# Altium PCB Panel_Battery_Charger.PcbDoc
Units mm, origin at the board's own origin, x right, y up, seen from the top; angles counter-clockwise.
Board outline 122.68 x 117.35 mm, 6 copper layers (L1S-TOP, L2PWR-VSS, L3S, L4S, L5PWR-VSS, L6S-BOT), stack 1.567 mm thick; 6 components, 0 nets, 9 pads, 0 vias.
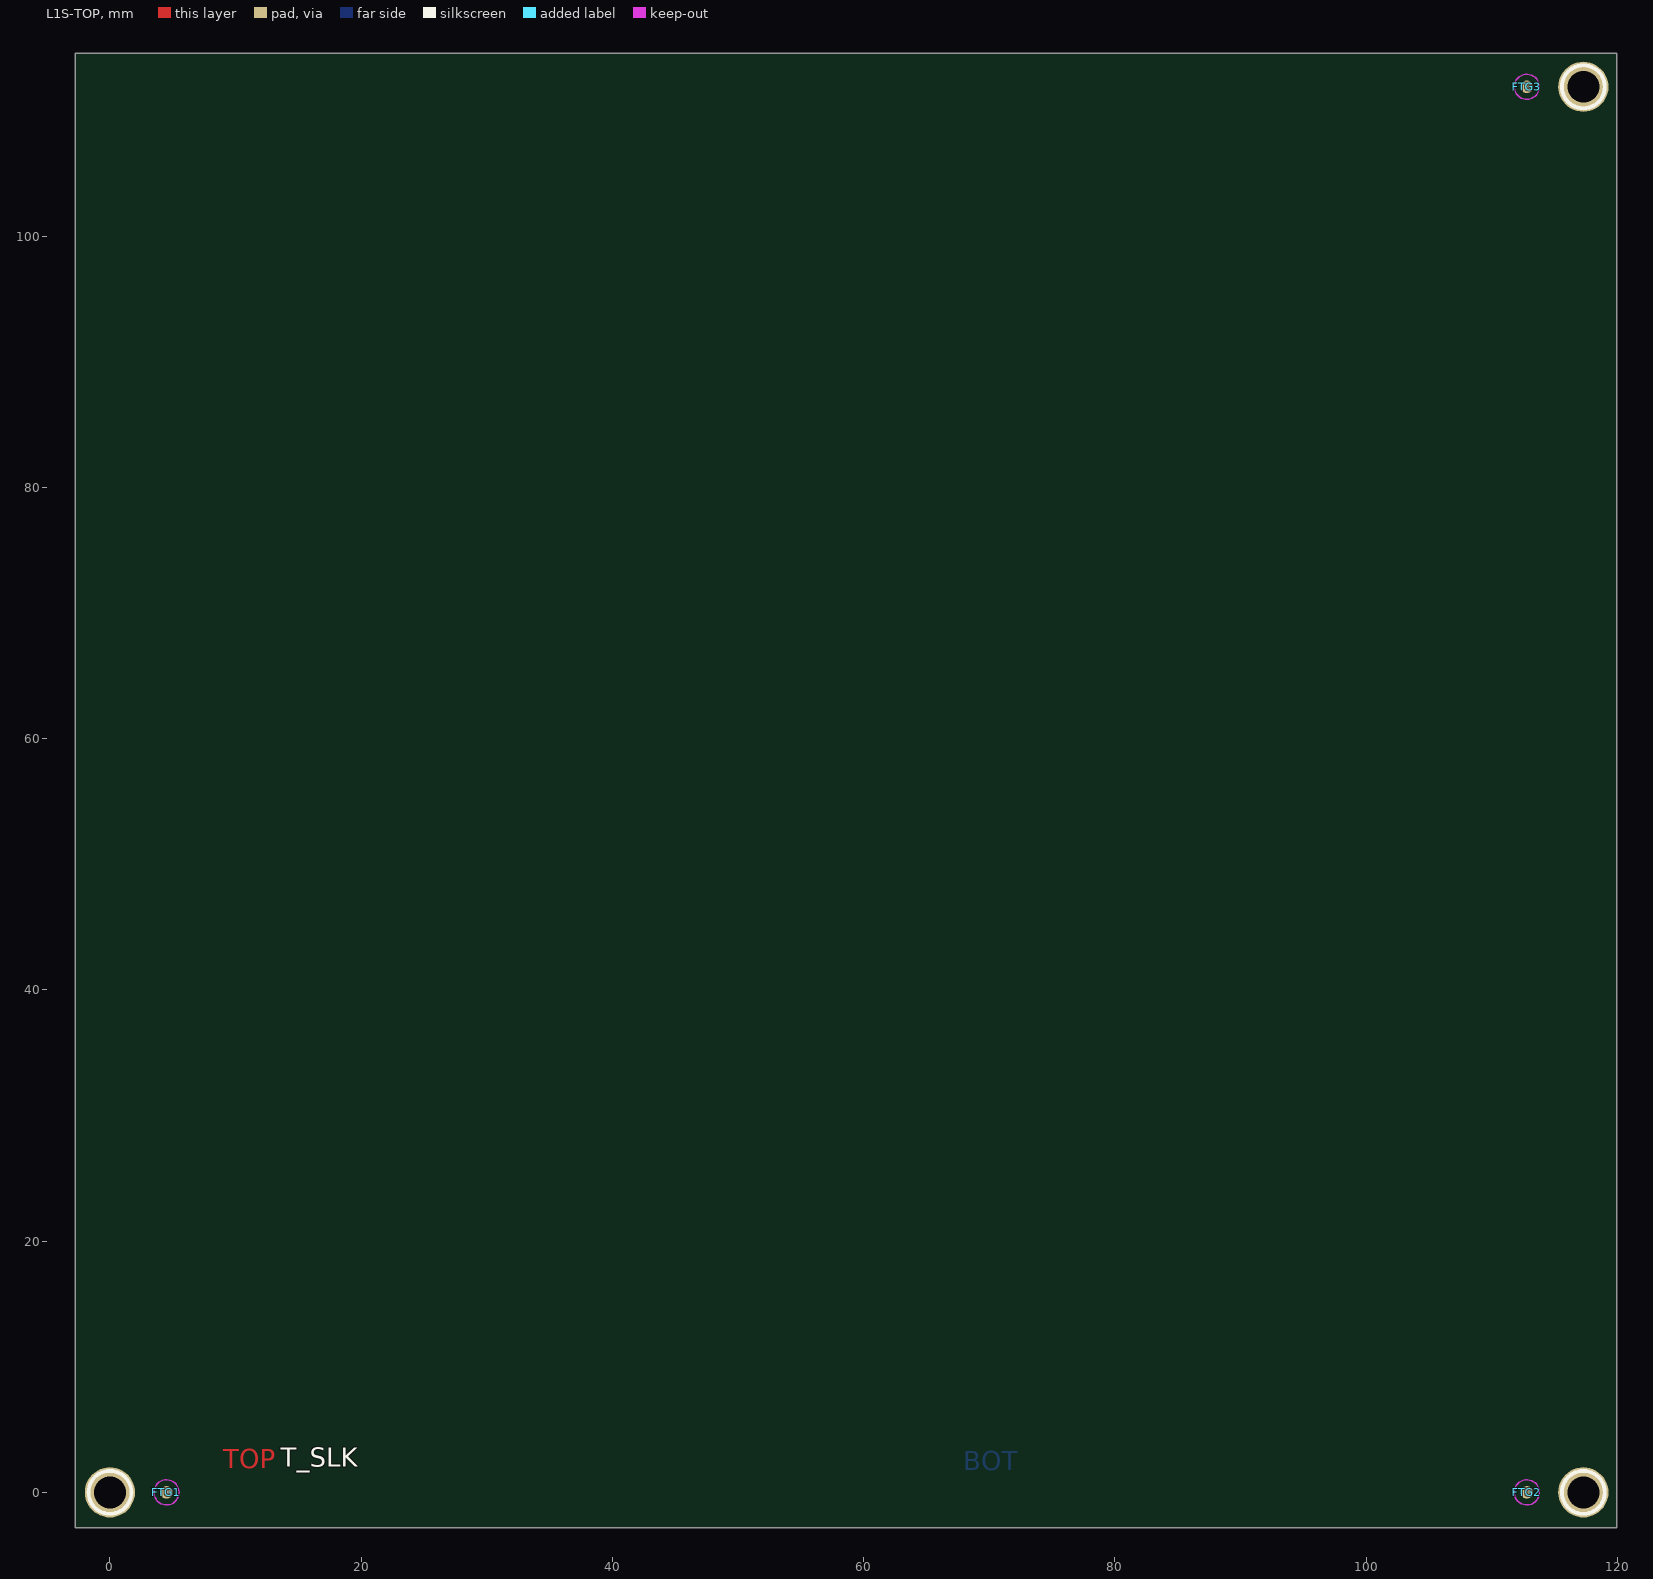
[diagram p0: L1S-TOP view]
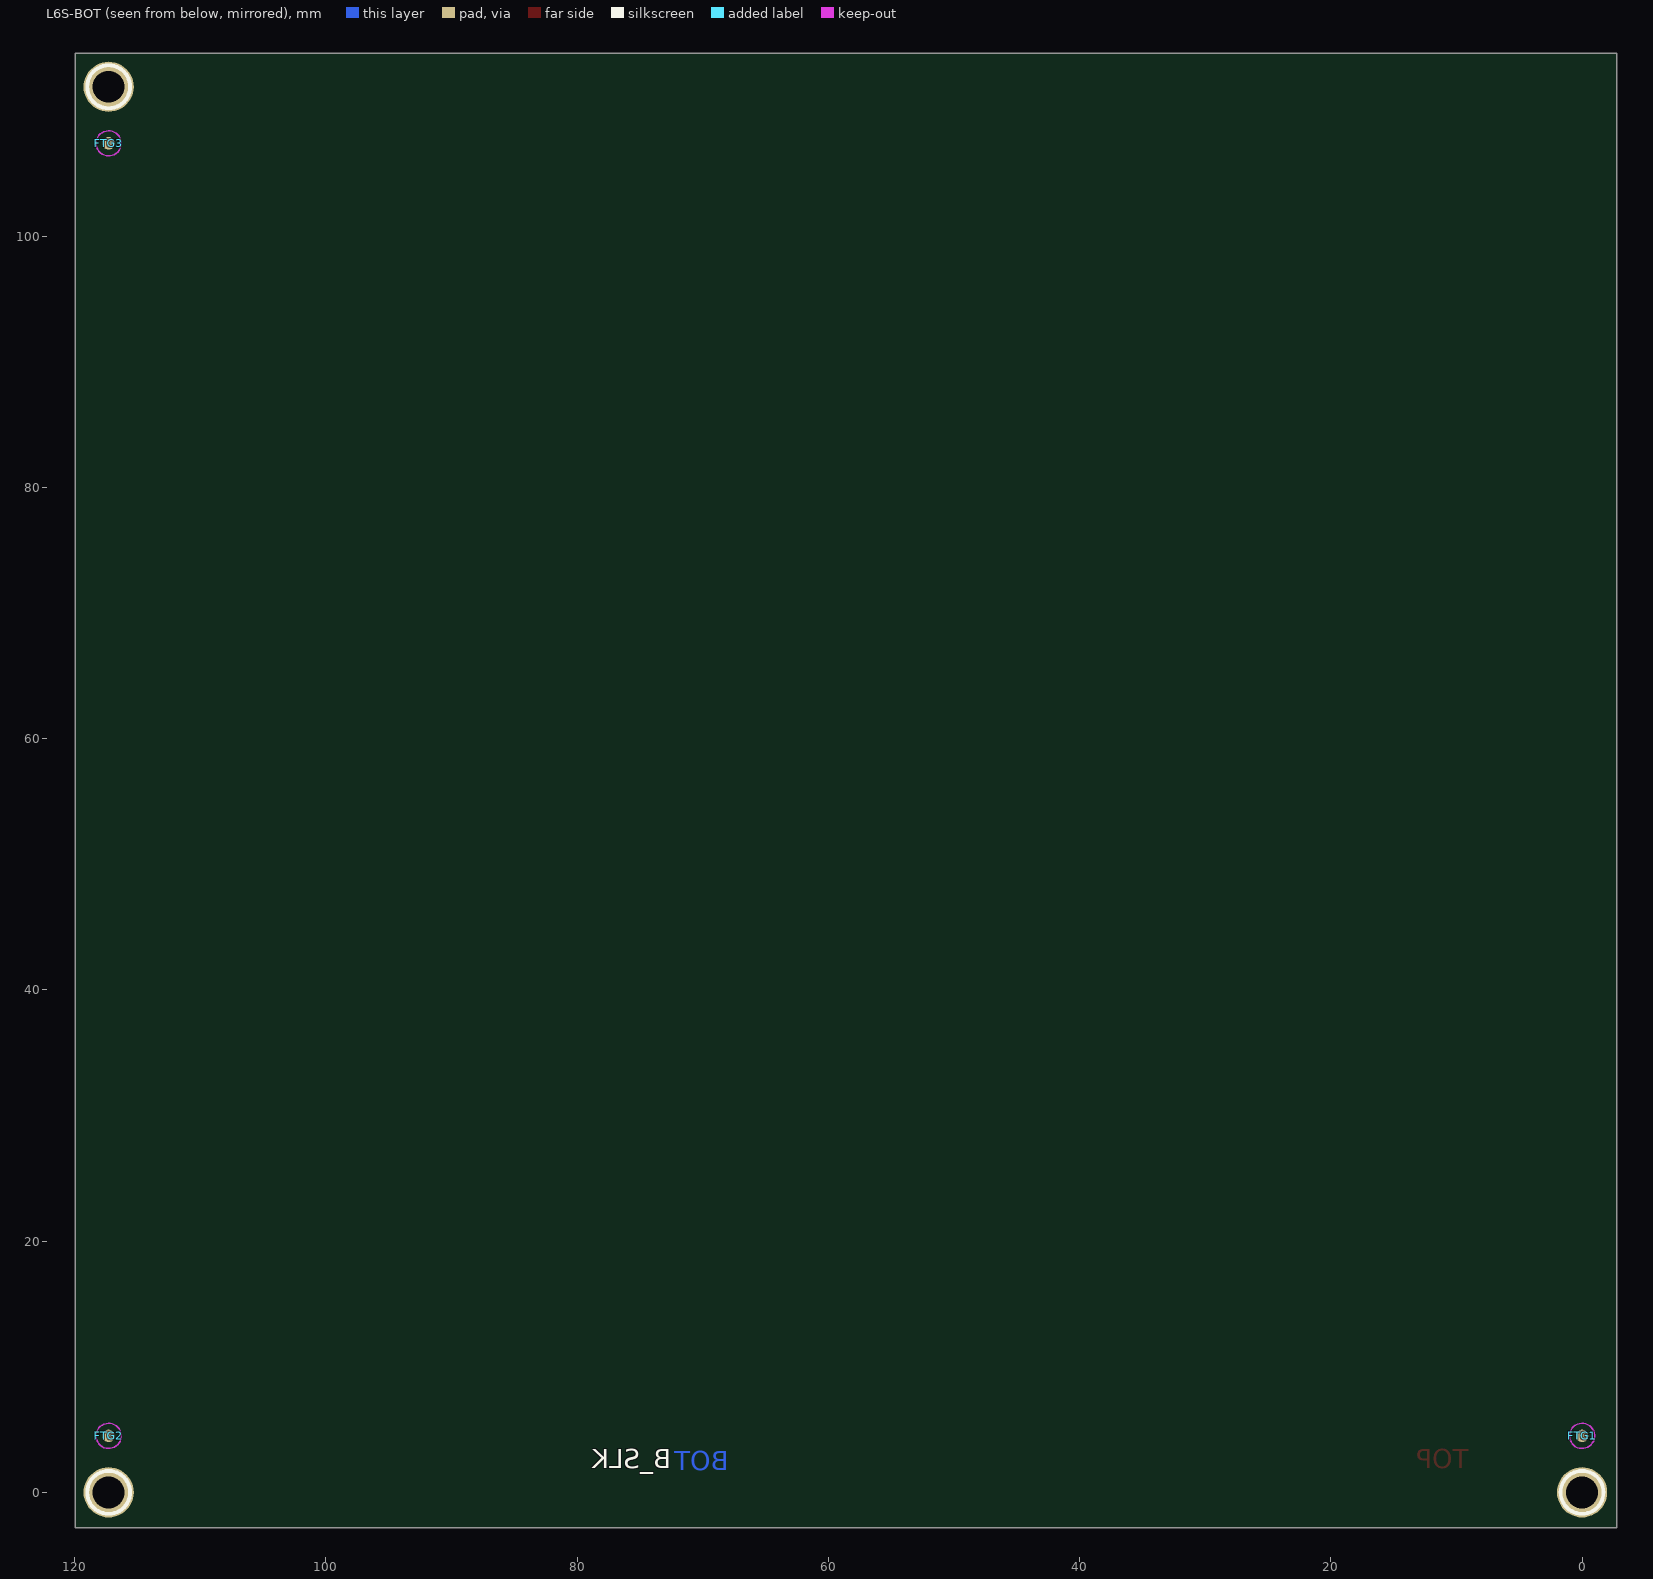
[diagram p1: L6S-BOT view, seen from below]

## Layer stack, top to bottom
Top Solder: solder mask 0.017, Solder Resist, Dk 4
L1S-TOP: signal copper 0.035
PP-1080*1: prepreg 0.078, FR-4, Dk 3.9
L2PWR-VSS: signal copper 0.015
PP-1080*2-1: prepreg 0.156, FR-4, Dk 3.9
L3S: signal copper 0.017
Core_1: core 0.965, FR-4, Dk 4.6
L4S: signal copper 0.017
PP-1080*2-2: prepreg 0.156, FR-4, Dk 3.9
L5PWR-VSS: signal copper 0.015
Dielectric 5: prepreg 0.078, FR-4, Dk 3.9
L6S-BOT: signal copper 0.035
Bottom Solder: solder mask 0.017, Solder Resist, Dk 4

## Board outline
-2.742,-2.797 -2.742,114.551 119.94,114.551 119.94,-2.797

## Design rules (kind name [scope] priority, off if disabled: settings)
Clearance [All] p1: gap=0.254 ignorepadtopadclearanceinfootprint=FALSE except(0: Arc-Hole Track-Hole SMDPad-Hole THPad-Hole Via-Hole Fill-Hole Poly-Hole Region-Hole Text-Hole)
PolygonConnect [All] p1: connectstyle=Relief reliefconductorwidth=0.254 reliefentries=4 polygonreliefangle="90 Angle" airgapwidth=0.254
RoutingVias [All] p1: holewidth=0.711 width=1.27 viastyle="Through Hole" minholewidth=0.711 minwidth=1.27 maxholewidth=0.711 maxwidth=1.27
SolderMaskExpansion [All] p1: expansion=0.102
Width [All] p1: maxlimit=0.254 minlimit=0.254 preferedwidth=0.254
30 further rules are at their usual default settings.

## Components (designator, comment, footprint, x,y, rotation, side; value= is the part's Value field where it differs from the comment)
FTG1 "Use only in PCB" Fiducial_Bottom_C100_200#1 0,4.5 r90 top (schematic designator FTG4)
FTG1 "Use only in PCB" FIDUCIAL_TOP_C100-200#1 4.5,0 r0 top
FTG2 "Use only in PCB" Fiducial_Bottom_C100_200#2 117.3,4.5 r90 top (schematic designator FTG4)
FTG2 "Use only in PCB" FIDUCIAL_TOP_C100-200#2 112.8,0 r0 top (schematic designator FTG1)
FTG3 "Use only in PCB" Fiducial_Bottom_C100_200#3 117.3,107.4 r90 top (schematic designator FTG4)
FTG3 "Use only in PCB" FIDUCIAL_TOP_C100-200#3 112.8,111.9 r0 top (schematic designator FTG1)

## Footprints (in the part's own frame and the unit in brackets; to place one, negate y for a bottom-side part, rotate by r counter-clockwise, add the part's x,y. Pads: shape width x height; smd on the part's side, far side on the other; paste and mask are expansions set on the pad)
Fiducial_Bottom_C100_200#1 [mm]
  round 1 smd far side paste-0.51 mask+0.5: FTG1(0,0)
  L6S-BOT keep-out circle w0.1: c0,0 r1
Fiducial_Bottom_C100_200#2 [mm]
  round 1 smd far side paste-0.51 mask+0.5: FTG2(0,0)
  L6S-BOT keep-out circle w0.1: c0,0 r1
Fiducial_Bottom_C100_200#3 [mm]
  round 1 smd far side paste-0.51 mask+0.5: FTG3(0,0)
  L6S-BOT keep-out circle w0.1: c0,0 r1
FIDUCIAL_TOP_C100-200#1 [mm] "Round Fiducial Target, Top Layer, 1.0mm, Top Solder 2.0mm, Keepout =2.0mm"
  round 1 smd paste-0.51 mask+0.5: FTG1(0,0)
  L1S-TOP keep-out circle w0.1: c0,0 r1
FIDUCIAL_TOP_C100-200#2 [mm] "Round Fiducial Target, Top Layer, 1.0mm, Top Solder 2.0mm, Keepout =2.0mm"
  round 1 smd paste-0.51 mask+0.5: FTG2(0,0)
  L1S-TOP keep-out circle w0.1: c0,0 r1
FIDUCIAL_TOP_C100-200#3 [mm] "Round Fiducial Target, Top Layer, 1.0mm, Top Solder 2.0mm, Keepout =2.0mm"
  round 1 smd paste-0.51 mask+0.5: FTG3(0,0)
  L1S-TOP keep-out circle w0.1: c0,0 r1

## Part data
FTG1 FTG1 FTG2 FTG2 FTG3 FTG3: library part "Fiducial Target", "Fiducial Target"

## Free pads (board coordinates)
  round 4 hole 2.54: 1(0,0) 2(117.3,0) 3(117.3,111.9)

## Nets (pads, with @x,y where several pads share a name; then routed paths per layer and width w, separated by ;. In a path a pad name is that pad's centre, name@x,y a point inside that pad or via, vN(x,y) a via of type N, cw(c..) or ccw(c..) an arc to the next point about the centre after c; other vN are vias at no path point)
pads on no net: FTG1.FTG1 FTG2.FTG2 FTG3.FTG3

## Other copper
L1S-TOP:
  text "TOP" at 9.017,1.905 h1.52
L6S-BOT:
  text "BOT" at 67.945,1.778 h1.52

## Silkscreen, mask and mechanical layers (free items; w line width, h text height)
Top Overlay:
  circle w0.3: c117.3,111.9 r1.709
  circle w0.3: c117.3,0 r1.709
  circle w0.3: c0,0 r1.709
  text "T_SLK" at 13.589,2.032 h1.52
Bottom Overlay:
  circle w0.3: c117.3,111.9 r1.709
  circle w0.3: c117.3,0 r1.709
  circle w0.3: c0,0 r1.709
  text "B_SLK" at 72.517,1.905 h1.52
Top Paste:
  text "T_PASTE" at 8.89,-0.635 h1.52
Bottom Paste:
  text "B_PASTE" at 67.818,-0.762 h1.52
Top Solder:
  text "T_SOLDER" at 8.89,-0.635 h1.52
Bottom Solder:
  text "B_SOLDER" at 67.818,-0.762 h1.52
Board:
  the board outline again, w1

## Dimensions
-2.742,114.551 to 119.94,114.551 on Board
119.94,114.551 to 119.94,-2.797 on Board

## Panel: embedded boards
"REV11_PCB_DESIGN_LAYOUT.PcbDoc" at 6.529,14.296, 1 rows x 1 columns, spacing 57 x 60.961, rotation 0